# Altium PCB HYPNOSIA_controller_V2.PcbDoc
Units mm, origin at the board's own origin, x right, y up, seen from the top; angles counter-clockwise.
Board outline 106 x 58 mm, 2 copper layers (Top Layer, Bottom Layer), stack 0.78 mm thick; 56 components, 74 nets, 404 pads, 88 vias.
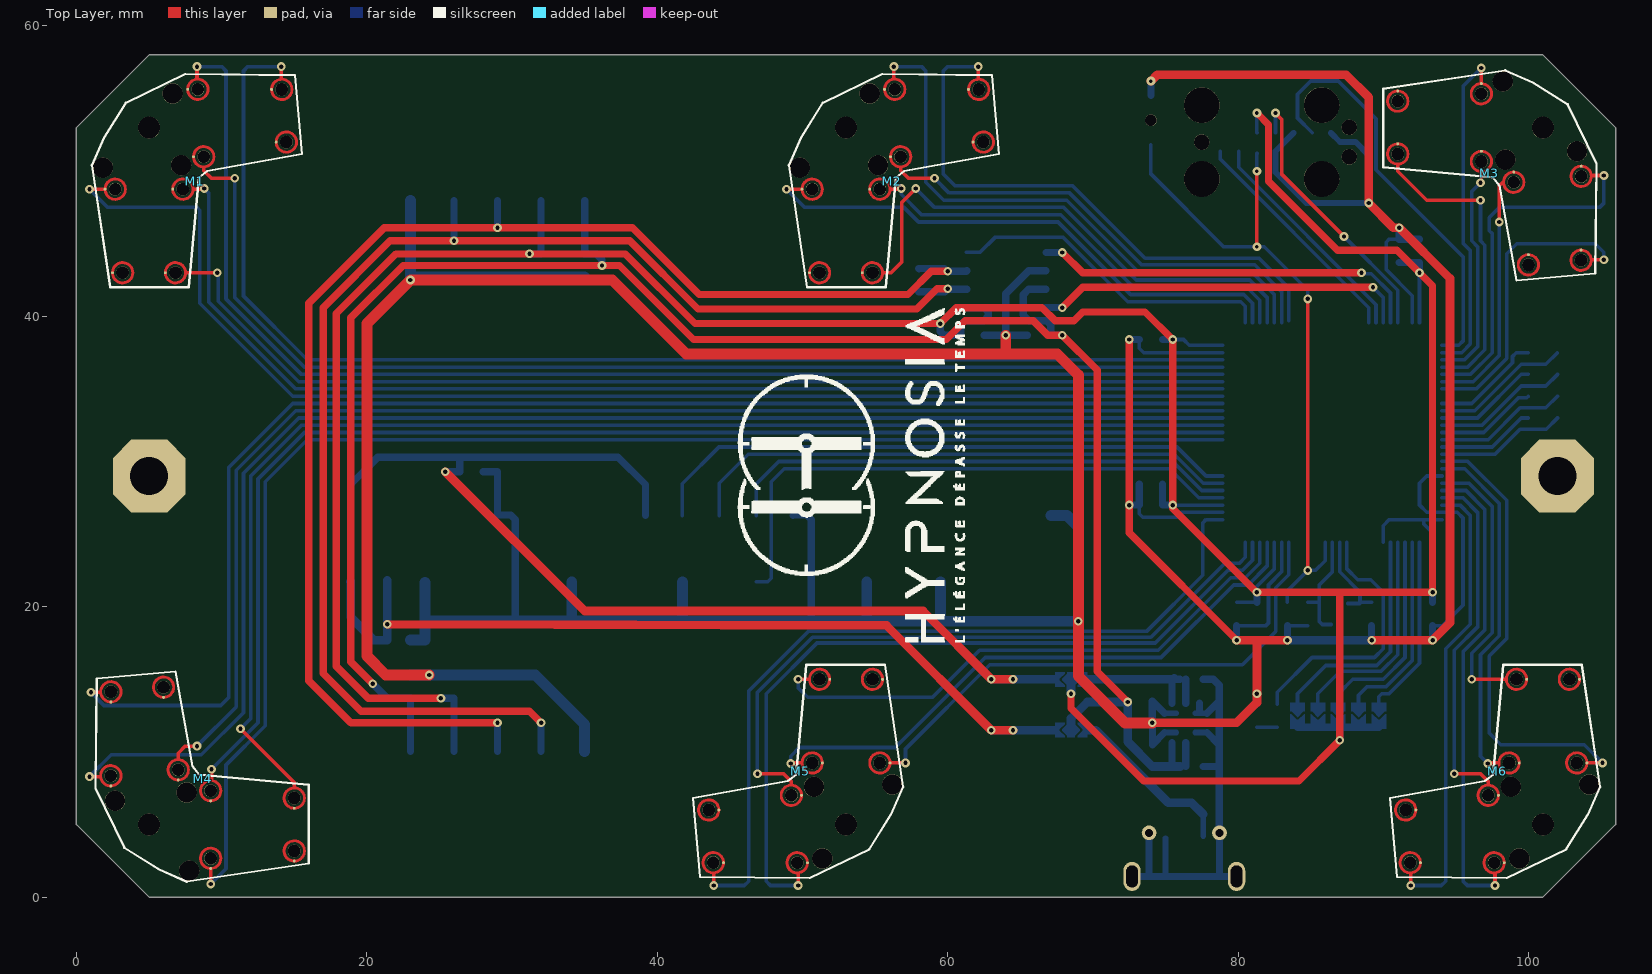
[diagram p0: Top Layer view]
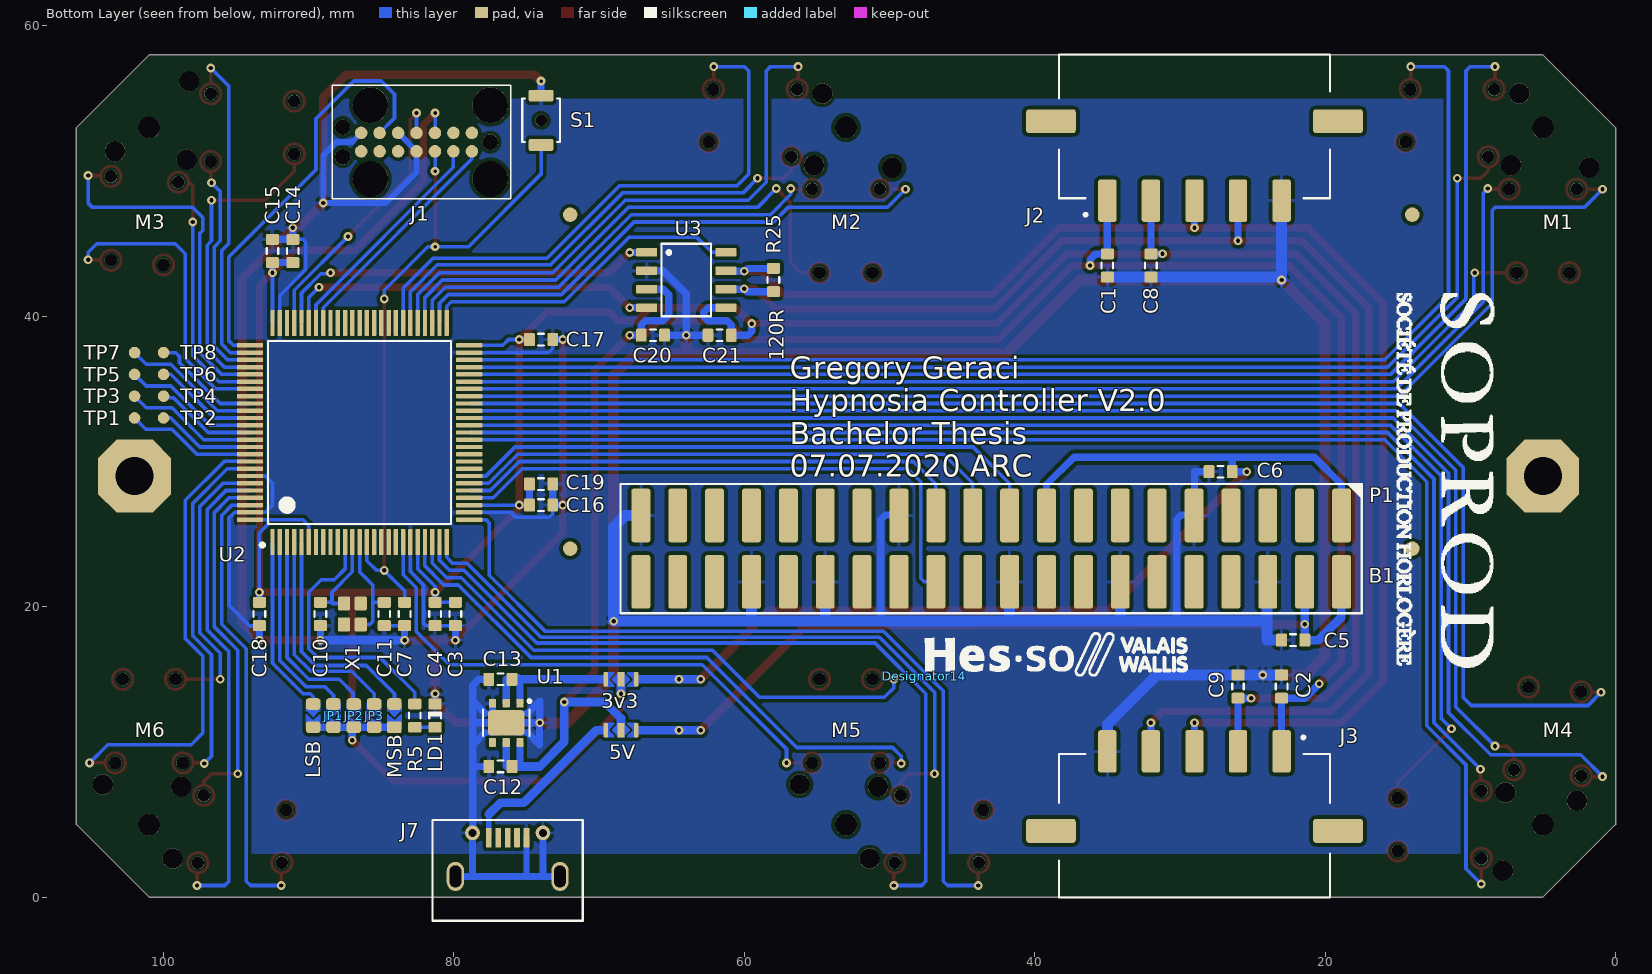
[diagram p1: Bottom Layer view, seen from below]
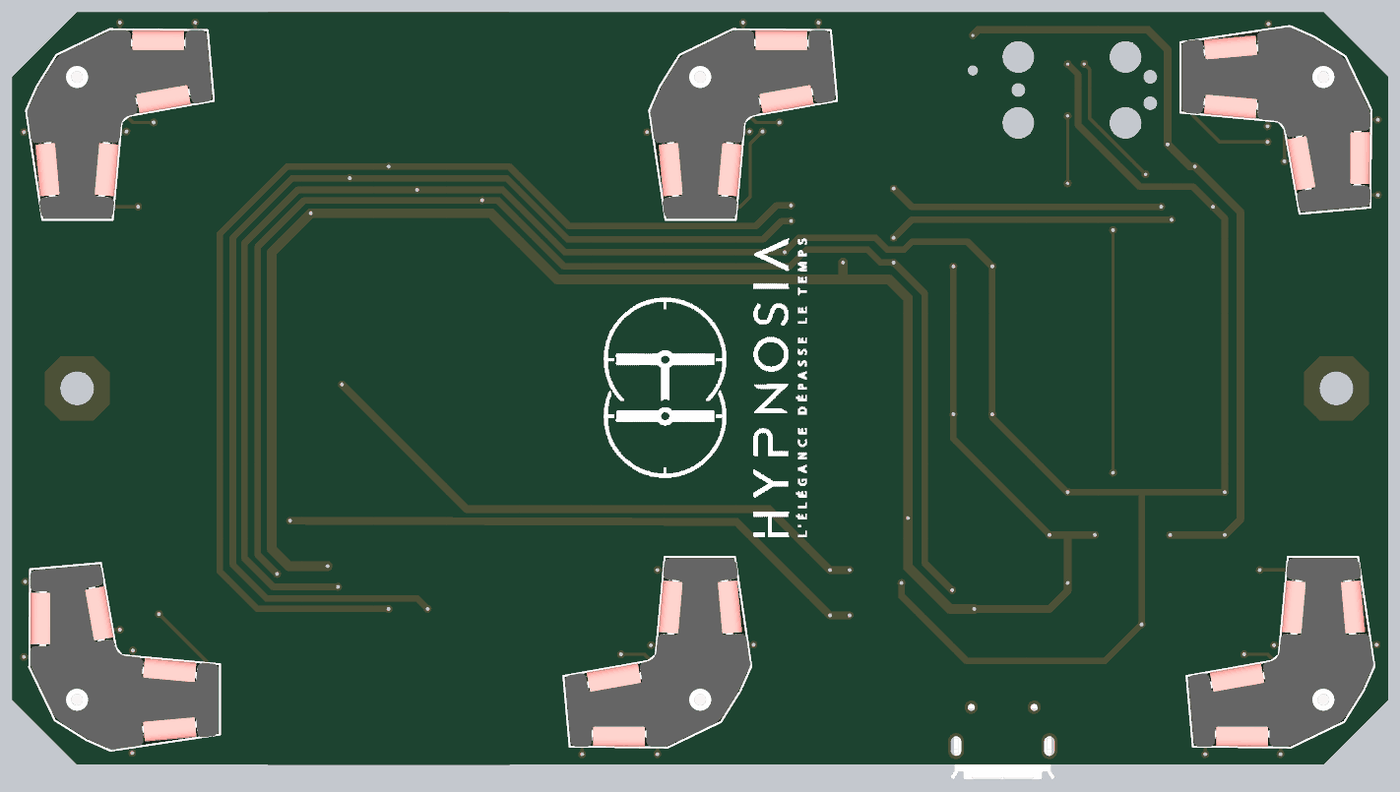
[diagram p2: 3D render of the assembled board from above, using the file's embedded part models]

## Layer stack, top to bottom
Top Solder: solder mask 0.1, Solder Resist, Dk 3.5
Top Layer: signal copper 0.035
Dielectric 3: prepreg 0.71, Dk 4.2
Bottom Layer: signal copper 0.035
Bottom Solder: solder mask 0.1, Solder Resist, Dk 3.5

## Board outline
5,0 0,5 0,53 5,58 101,58 106,53 106,5 101,0

## Design rules (kind name [scope] priority, off if disabled: settings)
AcuteAngle [All] p1: minimum=9.00000000000000E+0001 checktracksonly=TRUE
AssemblyTestPointUsage [All] p1 off:
AssemblyTestpoint [All] p1 off: testpointundercomponent=TRUE minsize=1.016 maxsize=2.54 preferedsize=1.524 minholesize=0 maxholesize=1.016 preferedholesize=0.813 testpointgrid=0.025 usegrid=TRUE gridtolerance=0 allowsidetop=TRUE allowsidebottom=TRUE
BoardOutlineClearance [All] p1: gap=0.25 ignorepadtopadclearanceinfootprint=FALSE
Clearance [All] p1: gap=0.14 ignorepadtopadclearanceinfootprint=FALSE except(0.25: Arc-Poly Track-Poly SMDPad-Poly THPad-Poly Via-Poly Fill-Poly Poly-Poly Poly-Region Poly-Text Poly-Hole)
ComponentClearance [All] p1 off: gap=0.25 collisioncheckmode=3 verticalgap=2540 showdistances=FALSE
DiffPairsRouting [All] p1 off: maxlimit=0.254 minlimit=0.254 mostfreqgap=0.254 toplayer_minwidth=0.381 toplayer_maxwidth=0.381 toplayer_prefwidth=0.381 bottomlayer_minwidth=0.381 bottomlayer_maxwidth=0.381 bottomlayer_prefwidth=0.381 maxuncoupledlength=12.7
FabricationTestPointUsage [All] p1 off: valid=0 allowmultiple=FALSE
FabricationTestpoint [All] p1 off: side=3 testpointundercomponent=TRUE minsize=1.016 maxsize=2.54 preferedsize=1.524 minholesize=0 maxholesize=1.016 preferedholesize=0.813 testpointgrid=0.025 allowsidetop=TRUE allowsidebottom=TRUE usegrid=TRUE gridtolerance=0
FanoutControl Fanout_BGA [IsBGA] p1 off: bgadir=Out bgaviamode=Centered fanoutstyle=Auto fanoutdirection=Alternating viagrid=0.025 // Fanout_BGA (Default Rule)
FanoutControl Fanout_LCC [IsLCC] p2 off: bgadir=Out bgaviamode=Centered fanoutstyle=Auto fanoutdirection=Alternating viagrid=0.025 // Fanout_LCC (Default Rule)
FanoutControl Fanout_SOIC [IsSOIC] p3 off: bgadir=Out bgaviamode=Centered fanoutstyle=Auto fanoutdirection=Alternating viagrid=0.025 // Fanout_SOIC (Default Rule)
FanoutControl Fanout_Small [(CompPinCount < 5)] p4 off: bgadir=Out bgaviamode=Centered fanoutstyle=Auto fanoutdirection=OutThenIn viagrid=0.025 // Fanout_Small (Default Rule)
FanoutControl Fanout_Default [All] p5 off: bgadir=Out bgaviamode=Centered fanoutstyle=Auto fanoutdirection=Alternating viagrid=0.025 // Fanout_Default (Default Rule)
Height [All] p1 off: minheight=0 maxheight=25.4 prefheight=12.7
HoleSize [All] p1: absolutevalues=TRUE maxlimit=3 minlimit=0.35 maxpercent=80.000 minpercent=20.000
HoleToHoleClearance [All] p1: gap=0.25 allowstackedmicrovias=TRUE
MinimumAnnularRing [All] p1: minimumring=0.175
MinimumSolderMaskSliver [All] p1 off: minsoldermaskwidth=0
PlaneClearance [All] p1: clearance=0.25
PlaneConnect [All] p1: planeconnectstyle=Relief reliefexpansion=0.5 reliefentries=4 reliefconductorwidth=0.25 reliefairgap=0.25
PolygonConnect [All] p1: connectstyle=Relief reliefconductorwidth=0.25 reliefentries=4 polygonreliefangle="90 Angle" airgapwidth=0.25
RoutingCorners [All] p1 off: cornerstyle=45-Degree minsetback=2.5 maxsetback=2.5
RoutingLayers [All] p1 off: top layer_v5=TRUE bottom layer_v5=TRUE
RoutingPriority [All] p1 off: routingpriority=0
RoutingTopology [All] p1 off: topology=Shortest
RoutingVias [All] p1: holewidth=0.3 width=1.3 viastyle="Through Hole" minholewidth=0.15 minwidth=0.3 maxholewidth=0.9 maxwidth=0.8
SilkToBoardRegionClearance [All] p1 off:
SilkToSilkClearance [All] p1 off: silktosilkclearance=0
SilkToSolderMaskClearance [IsPad] p1 off: minsilkscreentomaskgap=0 clearancetoexposedcopper=TRUE
SolderMaskExpansion [All] p1: expansion=0
Width [All] p1: maxlimit=4 minlimit=0.15 preferedwidth=0.25
6 further rules are at their usual default settings.

## Components (designator, comment, footprint, x,y, rotation, side; value= is the part's Value field where it differs from the comment)
3v3 "{Value}" "JUMPER3 SMD 1608" 68.5,15 r0 bottom
5V "{Value}" "JUMPER3 SMD 1608" 68.5,11.5 r0 bottom
B1 "Raspberry Pi Zero Socket" "Raspberry Pi Zero Socket SMD" 43,24 r0 bottom locked
C1 "100nF" "CAPACITOR 1608 REFLOW" 35,43.5 r90 bottom
C2 "100nF" "CAPACITOR 1608 REFLOW" 23,14.5 r270 bottom
C3 "10nF" "CAPACITOR 1608 REFLOW" 79.9,19.5 r90 bottom
C4 "1uF" "CAPACITOR 1608 REFLOW" 81.3,19.5 r90 bottom
C5 "100nF" "CAPACITOR 1608 REFLOW" 22.2,17.7 r0 bottom
C6 "100nF" "CAPACITOR 1608 REFLOW" 27.2,29.3 r180 bottom
C7 "100nF" "CAPACITOR 1608 REFLOW" 83.4,19.5 r90 bottom
C8 "100nF" "CAPACITOR 1608 REFLOW" 32,43.5 r90 bottom
C9 "100nF" "CAPACITOR 1608 REFLOW" 26,14.5 r270 bottom
C10 "10pF" "CAPACITOR 1608 REFLOW" 89.2,19.5 r270 bottom
C11 "10pF" "CAPACITOR 1608 REFLOW" 84.8,19.5 r270 bottom
C12 "10uF" "CAPACITOR 1608 REFLOW" 76.801,9 r180 bottom
C13 "10uF" "CAPACITOR 1608 REFLOW" 76.801,15 r180 bottom
C14 "100nF" "CAPACITOR 1608 REFLOW" 91.1,44.5 r270 bottom
C15 "4.7uF" "CAPACITOR 1608 REFLOW" 92.5,44.5 r270 bottom
C16 "100nF" "CAPACITOR 1608 REFLOW" 74,27 r0 bottom
C17 "100nF" "CAPACITOR 1608 REFLOW" 74,38.4 r0 bottom
C18 "100nF" "CAPACITOR 1608 REFLOW" 93.4,19.5 r90 bottom
C19 "4.7uF" "CAPACITOR 1608 REFLOW" 74,28.445 r0 bottom
C20 "100nF" "CAPACITOR 1608 REFLOW" 66.3,38.7 r0 bottom
C21 "100nF" "CAPACITOR 1608 REFLOW" 61.7,38.699 r180 bottom
Designator14 "Comment" "HES-SO_3 Top Overlay" 47.595,15.2 r180 bottom
J1 "TAG CONNECT TC2070-IDC" "TAG CONNECT TC2070-IDC" 77.5,52 r0 bottom
J2 "43650-0512" "MOLEX 43650-0512" 29,53 r0 bottom
J3 "43650-0512" "MOLEX 43650-0512" 29,5 r180 bottom
J7 "USB-MICRO-B" "USB-MICRO-B HIROSE ZX62D-B-5PA8" 76.3,4.1 r180 bottom
JP1 "{Value}" "JUMPER2 SMD 1608 Improved"#1 88.3,12.5 r270 bottom
JP2 "{Value}" "JUMPER2 SMD 1608 Improved"#1 86.9,12.5 r270 bottom
JP3 "{Value}" "JUMPER2 SMD 1608 Improved"#1 85.5,12.5 r270 bottom
LD1 "TBR" "LED 1608 REFLOW" 81.3,12.5 r270 bottom value=Blue
LSB "{Value}" "JUMPER2 SMD 1608 Improved"#1 89.7,12.5 r270 bottom
M1 "GB3MV2.2" GB2MV2.1 5,53 r0 top locked
M2 "GB3MV2.2" GB2MV2.1 53,53 r0 top locked
M3 "GB3MV2.2" GB2MV2.1 101,53 r270 top locked
M4 "GB3MV2.2" GB2MV2.1 5,5 r90 top locked
M5 "GB3MV2.2" GB2MV2.1 53,5 r180 top locked
M6 "GB3MV2.2" GB2MV2.1 101,5 r180 top locked
MSB "{Value}" "JUMPER2 SMD 1608 Improved"#2 84.1,12.5 r270 bottom
R5 "TBR" "RESISTOR 1608 REFLOW" 82.7,12.5 r90 bottom value=60
R25 "120" "RESISTOR 1608 REFLOW" 58,42.5 r270 bottom
S1 "*" "Push Button C2.5X3.0 OMRON B3U-1000P(M)-B" 74,53.503 r270 bottom
TP1 "*" "Pad D0.8" 102,33 r180 bottom
TP2 "*" "Pad D0.8" 100,33 r180 bottom
TP3 "*" "Pad D0.8" 102,34.5 r180 bottom
TP4 "*" "Pad D0.8" 100,34.5 r180 bottom
TP5 "*" "Pad D0.8" 102,36 r180 bottom
TP6 "*" "Pad D0.8" 100,36 r180 bottom
TP7 "*" "Pad D0.8" 101.996,37.5 r180 bottom
TP8 "*" "Pad D0.8" 100,37.5 r180 bottom
U1 "LD39200PU" "DFN6 P0.95 T1.75X2.50 C3.0X3.0 H1.0" 76.4,12 r270 bottom
U2 "STM32F072V8T6" "LQFP100 P0.5 C14.0X14.0 H1.6" 86.5,32 r90 bottom
U3 "=Value" "SO8 P1.27 C4.0X5.0 H1.75" 64,42.5 r180 bottom
X1 "16MHz" "Crystal C2.5x2 Seiko Epson FA-128" 87,19.5 r90 bottom

## Footprints (in the part's own frame and the unit in brackets; to place one, negate y for a bottom-side part, rotate by r counter-clockwise, add the part's x,y. Pads: shape width x height; smd on the part's side, far side on the other; paste and mask are expansions set on the pad)
"CAPACITOR 1608 REFLOW" [mm] "Capacitor SMD 1.6x0.8mm (0603-imperial)"
  rrect25% 0.75x0.9 smd: 1(-0.8,0) 2(0.8,0)
  silkscreen extent -0.2,-0.4 0.2,0.4, body extent -0.8,-0.4 0.8,0.4, height 0.8
"Crystal C2.5x2 Seiko Epson FA-128" [mm] "Crystal Seiko Epson FA-128, Case 2.0x1.6, Height 0.5"
  rrect25% 0.95x0.85 smd: 1(-0.725,-0.575) 2(0.725,-0.575) 3(0.725,0.575) 4(-0.725,0.575)
  body extent -1,-0.8 1,0.8, height 0.5
"DFN6 P0.95 T1.75X2.50 C3.0X3.0 H1.0" [mm] "DFN6 P0.95 T1.75X2.50 C3.0X3.0 H1.0"
  rrect25% 0.6x0.5 smd: 1(-1.35,0.95) 2(-1.35,0) 3(-1.35,-0.95) 4(1.35,-0.95) 5(1.35,0) 6(1.35,0.95)
  rrect25% 1.75x2.5 smd: 7(0,0)
  silkscreen extent -1.6,-1.6 0.9,1.7, body extent -1.5,-1.5 1.5,1.5, height 1.1
GB2MV2.1 [mm] "Soprod Gear Box, 2 motors 102.02.xxx, Option B"
  round 0.88 hole 0.88 unplated mask+0.4: 0(-2.33,-4.242) 0(-1.82,-10) 0(1.82,-10) 0(2.33,-4.242) 0(3.359,2.633) 0(3.765,-2.009) 0(9.139,2.627) 0(9.456,-1)
  round 0.2 smd: 1(-3.03,-4.242) 2(-2.52,-10) 3(1.12,-10) 4(1.63,-4.242) 5(2.659,2.633) 6(3.065,-2.009) 7(8.439,2.627) 8(8.756,-1)
  round 1.5 hole 1.5 unplated: 14(0,0)
  round 1.4 hole 1.4 unplated: A1(-3.182,-2.758) A2(1.637,2.344) A3(2.207,-2.596)
  Top Layer circle w0.2: c9.456,-1 r0.7
  Top Layer circle w0.2: c9.139,2.627 r0.7
  Top Layer circle w0.2: c3.765,-2.009 r0.7
  Top Layer circle w0.2: c3.359,2.633 r0.7
  Top Layer circle w0.2: c2.33,-4.242 r0.7
  Top Layer circle w0.2: c1.82,-10 r0.7
  Top Layer circle w0.2: c-1.82,-10 r0.7
  Top Layer circle w0.2: c-2.33,-4.242 r0.7
  silkscreen extent -3.94,-11 10.54,3.68, body extent -8.25,-13.45 13.41,8.21, height 4.4
"HES-SO_3 Top Overlay" [mm] "HESSO LOGO 3mm on TopOverlay"
  silkscreen extent 0.01,0 18.12,3
"JUMPER2 SMD 1608 Improved"#1 [mm] "JUMPER SMD 2 LEADS 1608 (0603-Imperial)"
  rrect50% 0.8x1 smd paste-0.8: 1(-0.8,0) 2(0.8,0)
  Top Layer region: -0.1,0.45 0.3,0.05 0.3,-0.05 -0.1,-0.45 -0.1,-0.5 0.9,-0.5 0.9,0.5 -0.1,0.5
  Top Layer region: -0.9,0.5 -0.9,-0.5 -0.3,-0.5 -0.3,-0.4 0.1,0 -0.3,0.4 -0.3,0.5
"JUMPER2 SMD 1608 Improved"#2 [mm] "JUMPER SMD 2 LEADS 1608 (0603-Imperial)"
  rrect50% 0.8x1 smd paste-0.8: 1(-0.8,0)
  rrect25% 0.8x1 smd paste-0.8: 2(0.8,0)
  Top Layer region: -0.1,0.45 0.3,0.05 0.3,-0.05 -0.1,-0.45 -0.1,-0.5 0.9,-0.5 0.9,0.5 -0.1,0.5
  Top Layer region: -0.9,0.5 -0.9,-0.5 -0.3,-0.5 -0.3,-0.4 0.1,0 -0.3,0.4 -0.3,0.5
"JUMPER3 SMD 1608" [mm] "JUMPER SMD 3LEADS 1608 (0603-Imperial)"
  rrect50% 0.3x1 smd paste-0.8 mask-0.5: 1(-1.05,0) 3(1.05,0)
  rect 0.5x1 smd paste-0.8 mask-0.5: 2(0,0)
  Top Layer region: 1.1,-0.5 1.1,0.5 0.45,0.5 0.45,0.4 0.8,0.05 0.8,-0.05 0.45,-0.4 0.45,-0.5
  Top Layer region: -0.25,0.4 -0.6,0.05 -0.6,-0.05 -0.25,-0.4 -0.25,-0.5 0.25,-0.5 0.25,-0.4 0.6,-0.05 0.6,0.05 0.25,0.4 0.25,0.5 0.1,0.5 -0.25,0.5
  Top Layer region: -1.1,0.5 -1.1,-0.5 -0.45,-0.5 -0.45,-0.4 -0.8,-0.05 -0.8,0.05 -0.45,0.4 -0.45,0.5
"LED 1608 REFLOW" [mm] "LED SMD 1.6x0.8mm (0603-imperial)"
  rrect25% 0.75x0.9 smd: 1(-0.8,0) 2(0.8,0)
  silkscreen extent -0.2,-0.4 0.2,0.4, body extent -0.8,-0.4 0.8,0.4, height 0.45
"LQFP100 P0.5 C14.0X14.0 H1.6" [mm] "Thin QFP, 100-Leads, Body 14x14mm, Pitch 0.5mm, IPC Medium Density"
  rrect25% 1.8x0.3 smd: 1(-7.55,6) 2(-7.55,5.5) 3(-7.55,5) 4(-7.55,4.5) 5(-7.55,4) 6(-7.55,3.5) 7(-7.55,3) 8(-7.55,2.5) 9(-7.55,2) 10(-7.55,1.5) 11(-7.55,1) 12(-7.55,0.5) 13(-7.55,0) 14(-7.55,-0.5) 15(-7.55,-1) 16(-7.55,-1.5) 17(-7.55,-2) 18(-7.55,-2.5) 19(-7.55,-3) 20(-7.55,-3.5) 21(-7.55,-4) 22(-7.55,-4.5) 23(-7.55,-5) 24(-7.55,-5.5) 25(-7.55,-6) 51(7.55,-6) 52(7.55,-5.5) 53(7.55,-5) 54(7.55,-4.5) 55(7.55,-4) 56(7.55,-3.5) 57(7.55,-3) 58(7.55,-2.5) 59(7.55,-2) 60(7.55,-1.5) 61(7.55,-1) 62(7.55,-0.5) 63(7.55,0) 64(7.55,0.5) 65(7.55,1) 66(7.55,1.5) 67(7.55,2) 68(7.55,2.5) 69(7.55,3) 70(7.55,3.5) 71(7.55,4) 72(7.55,4.5) 73(7.55,5) 74(7.55,5.5) 75(7.55,6)
  rrect25% 0.3x1.8 smd: 26(-6,-7.55) 27(-5.5,-7.55) 28(-5,-7.55) 29(-4.5,-7.55) 30(-4,-7.55) 31(-3.5,-7.55) 32(-3,-7.55) 33(-2.5,-7.55) 34(-2,-7.55) 35(-1.5,-7.55) 36(-1,-7.55) 37(-0.5,-7.55) 38(0,-7.55) 39(0.5,-7.55) 40(1,-7.55) 41(1.5,-7.55) 42(2,-7.55) 43(2.5,-7.55) 44(3,-7.55) 45(3.5,-7.55) 46(4,-7.55) 47(4.5,-7.55) 48(5,-7.55) 49(5.5,-7.55) 50(6,-7.55) 76(6,7.55) 77(5.5,7.55) 78(5,7.55) 79(4.5,7.55) 80(4,7.55) 81(3.5,7.55) 82(3,7.55) 83(2.5,7.55) 84(2,7.55) 85(1.5,7.55) 86(1,7.55) 87(0.5,7.55) 88(0,7.55) 89(-0.5,7.55) 90(-1,7.55) 91(-1.5,7.55) 92(-2,7.55) 93(-2.5,7.55) 94(-3,7.55) 95(-3.5,7.55) 96(-4,7.55) 97(-4.5,7.55) 98(-5,7.55) 99(-5.5,7.55) 100(-6,7.55)
  silkscreen extent -7.87,-6.3 6.3,6.83, body extent -7,-7 7,7, height 1.61
"MOLEX 43650-0512" [mm] "MicroFit RA HDR 5Ckt SR SMT w/SldTab"
  rrect25% 1.27x2.92 smd: 1(6,5.035) 2(3,5.035) 3(0,5.035) 4(-3,5.035) 5(-6,5.035)
  rrect25% 3.43x1.65 smd: 6(-9.885,-0.435) 7(9.885,-0.435)
  silkscreen extent -9.33,-5.03 9.33,6.1, body extent -11.44,-5.04 11.43,6.37, height 5.92
"Pad D0.8" [mm] "Test Point simple pad diameter 0.8, no hole"
  round 0.8 smd: 1(0,0)
"Push Button C2.5X3.0 OMRON B3U-1000P(M)-B" [mm] "Push Button C2.5X3.0 OMRON B3U-1000P(M)-B"
  rrect25% 0.8x1.7 smd: 1(-1.7,0) 2(1.7,0)
  round 0.8 hole 0.8 unplated: 3(0,0)
  silkscreen extent -1.5,-1.3 1.5,1.3, body extent -1.5,-1.25 1.5,1.25, height 1.6
"Raspberry Pi Zero Socket SMD" [mm] "Raspberry Pi Zero Socket"
  round 1 smd: 0(-29,-23) 0(-29,0) 0(29,-23) 0(29,0)
  rrect25% 1.3x3.7 smd: 1(-24.13,-2.286) 2(-24.13,2.286) 3(-21.59,-2.286) 4(-21.59,2.286) 5(-19.05,-2.286) 6(-19.05,2.286) 7(-16.51,-2.286) 8(-16.51,2.286) 9(-13.97,-2.286) 10(-13.97,2.286) 11(-11.43,-2.286) 12(-11.43,2.286) 13(-8.89,-2.286) 14(-8.89,2.286) 15(-6.35,-2.286) 16(-6.35,2.286) 17(-3.81,-2.286) 18(-3.81,2.286) 19(-1.27,-2.286) 20(-1.27,2.286) 21(1.27,-2.286) 22(1.27,2.286) 23(3.81,-2.286) 24(3.81,2.286) 25(6.35,-2.286) 26(6.35,2.286) 27(8.89,-2.286) 28(8.89,2.286) 29(11.43,-2.286) 30(11.43,2.286) 31(13.97,-2.286) 32(13.97,2.286) 33(16.51,-2.286) 34(16.51,2.286) 35(19.05,-2.286) 36(19.05,2.286) 37(21.59,-2.286) 38(21.59,2.286) 39(24.13,-2.286) 40(24.13,2.286)
  silkscreen extent -25.53,-4.45 25.53,4.44, body extent -25.4,-3.43 25.4,3.43, height 8.5
"RESISTOR 1608 REFLOW" [mm] "Resistor SMD 1.6x0.8mm (0603-imperial)"
  rrect25% 0.75x0.9 smd: 1(-0.8,0) 2(0.8,0)
  silkscreen extent -0.2,-0.4 0.2,0.4, body extent -0.77,-0.42 0.78,0.43, height 0.45
"SO8 P1.27 C4.0X5.0 H1.75" [mm] "8-Pin Small Outline Integrated Circuit 1.27 mm Pitch, IPC Medium Density"
  rrect25% 1.45x0.6 smd: 1(-2.725,1.905) 2(-2.725,0.635) 3(-2.725,-0.635) 4(-2.725,-1.905) 5(2.725,-1.905) 6(2.725,-0.635) 7(2.725,0.635) 8(2.725,1.905)
  silkscreen extent -1.7,-2.5 1.7,2.5, body extent -2,-2.5 2,2.5, height 1.76
"TAG CONNECT TC2070-IDC" [mil] "TAG CONNECT TC2070-IDC"
  round 34 smd: 1(50,-25) 2(100,-25) 3(150,-25) 4(200,-25) 5(250,-25) 6(300,-25) 7(350,-25) 8(350,25) 9(300,25) 10(250,25) 11(200,25) 12(150,25) 13(100,25) 14(50,25)
  round 96.5 hole 96.5 unplated: 15(0,100) 17(0,-100) 18(325,-100) 21(325,100)
  round 42 hole 42 unplated: 16(0,0) 19(400,-39.96) 20(400,39.96)
  silkscreen extent -55,-154 429,154
"USB-MICRO-B HIROSE ZX62D-B-5PA8" [mm] "USB-MICRO-B HIROSE nr. ZX62D-B-5PA8"
  rrect25% 0.4x1.35 smd: 1(-1.3,0) 2(-0.65,0) 3(0,0) 4(0.65,0) 5(1.3,0)
  round 1.016 hole 0.55: 6(2.425,0.325) 9(-2.425,0.325)
  oval 1.2x2 hole 0.8 slot 1.5 at 90 deg: 7(3.6,-2.675) 8(-3.6,-2.675)
  silkscreen extent -5.18,-5.72 5.18,1.2, body extent -4.05,-5.25 4.05,0.55, height 2.79

## Part data
3v3 5V: library part "JUMPER 3 POS", "JUMPER 3 POS"
B1: "Small single-board computer"
C1 C2 C3 C4 C5 C6 C7 C8 C9 C10 C11 C12 C13 C14 C15 C16 C17 C18 C19 C20 C21: library part Capacitor, "Capacitor"
J2 J3: library part "MOLEX 43650-0512", "MicroFit RA HDR 5Ckt SR SMT w/SldTab", Manufacturer=Molex, Mouser No=538-43650-0512
J7: library part "USB-MICRO-B HIROSE ZX62D-B-5PA8", "USB-MICRO-B HIROSE ZX62D-B-5PA8"
JP1 JP2 JP3 LSB MSB: library part "JUMPER 2 POS", "JUMPER 2 POS"
LD1: library part LED, "LED generic"
M1 M2 M3 M4 M5 M6: library part GB2MV2.1, "Soprod Gear Box, 2 motors 102.02.xxx"
R5 R25: library part Resistor, "Resistor"
S1: library part "Push Button 2Pins", "Push Button, 2 pins"
TP1 TP2 TP3 TP4 TP5 TP6 TP7 TP8: library part Pad, "Pad"
U1: library part LD39200, "2 A high PSRR ultra low drop linear regulator with reverse current protection", Manufacturer=ST
U2: "Arm-based 32-bit MCU, up to 128 KB Flash, crystal-less USB FS 2.0, CAN, 12 timers, ADC, DAC & comm. interfaces, 2.0 - 3.6 V", Manufacturer=ST, Mouser No=511-STM32F072V8T6
U3: library part MCP2542WFD-E/SN, "CAN FD Transceiver with Wake-Up Pattern (WUP) Option"
X1: library part "Crystal C2.5x2 Seiko Epson FA-128", "Crystal C2.5x2 Seiko Epson FA-128"

## Free pads (board coordinates)
  oct 5x5 hole 2.6 unplated: 0(5,29) 0(102,29)

## Via types
v1: diameter 0.6, hole 0.3, Top Layer to Bottom Layer, tented both sides, 82 vias
v2: diameter 0.6, hole 0.25, Top Layer to Bottom Layer, tented both sides, 6 vias

## Nets (pads, with @x,y where several pads share a name; then routed paths per layer and width w, separated by ;. In a path a pad name is that pad's centre, name@x,y a point inside that pad or via, vN(x,y) a via of type N, cw(c..) or ccw(c..) an arc to the next point about the centre after c; other vN are vias at no path point)
3v3: 3v3.2 C3.2 C4.2 C8.2 C9.2 C14.2 C15.2 C16.2 C17.2 C18.2 C19.2 C21.2 J1.3 J2.2 J3.2 JP1.2 JP2.2 JP3.2 LSB.2 MSB.2 U2.6 U2.21 U2.28 U2.50 U2.75 U2.100 U3.5 | length 258.5
  Top Layer w0.5: v1(25.1,13.7) 20.1,13.7 17.9,15.9 17.9,40.2 22,44.3 v1(31.2,44.3) 37.801,44.299 42.6,39.5 v1(59.5,39.5) 60.599,40.599 66.501,40.599 67.403,39.697 68.7,39.697 69.303,40.3 73.6,40.3 v1(75.5,38.4) v1(75.5,27) 75.5,26.762 81.281,20.981 v1(81.3,21) 87,21 ; v1(68.5,14) 68.5,13 73.5,8 84.2,8 v1(87,10.8) 87,21 ; v2(81.3,54) 82.1,53.2 82.1,49.3 86.85,44.55 90.95,44.55 v1(92.5,43) 93.4,42.1 v1(93.4,21) 87,21
  Bottom Layer w0.25: v1(75.5,27) U2.28 ; v1(75.5,38.4) 76.247,38.4 76.647,38 U2.50 ; C3.2 C4.2 ; v1(81.3,21) 81.3,21.4 82.5,22.6 U2.21 ; v2(81.3,54) 81.3,52.645 J1.3 ; U2.6 90,25.586 90.414,26 92.8,26 ; U2.75 v1(92.5,43) ; v1(93.4,21) 93.4,25.1 92.8,25.7 92.8,26 ; U2.100 92.8,26
  Bottom Layer w0.5: v1(25.1,13.7) C9.2 J3.2 ; v1(31.2,44.3) C8.2 J2.2 ; v1(59.5,39.5) 59.5,38.956 59.756,38.7 60.898,38.7 C21.2 60.9,39.399 61.201,39.7 62.5,39.7 62.8,40 62.8,40.3 62.501,40.599 61.279,40.599 U3.5 ; C19.2 C16.2 v1(75.5,27) ; C17.2 v1(75.5,38.4) ; C4.2 v1(81.3,21) ; MSB.2 JP2.2 ; v1(87,10.8) 87,11.6 JP2.2 ; LSB.2 JP1.2 JP2.2 ; C14.2 C15.2 v1(92.5,43) ; C18.2 v1(93.4,21)
  Bottom Layer w0.6: v1(68.5,14) 3v3.2
3v3_ext: 3v3.3 C13.2 U1.1 U1.2 | length 9.9
  Bottom Layer w0.5: U1.1 75.45,14.949 75.501,15 ; 75.601,15.1 75.501,15 ; C13.2 75.501,15 ; U1.2 76.4,15
  Bottom Layer w0.6: 3v3.3@69.6,15 75.501,15
3v3_RB: 3v3.1 B1.1 B1.17 C6.2 | length 77.6
  Top Layer w0.6: v1(25.4,29.3) 35,19.7 58.3,19.7 v1(63,15) v1(64.5,15)
  Bottom Layer w0.5: B1.1 18.87,28.415 20.755,30.3 26.4,30.3 ; v1(25.4,29.3) C6.2 26.4,30.3 ; B1.17 39.19,28.41 37.3,30.3 26.4,30.3
  Bottom Layer w0.6: v1(63,15) v1(64.5,15) 3v3.1@67.4,15
5V: 5V.2 C1.2 C2.2 C12.2 C20.2 J2.1 J3.1 U1.5 U1.6 U3.3 | length 141
  Top Layer w0.5: v1(20.4,14.7) 18.9,16.2 18.9,39.9 22.5,43.5 v1(36.2,43.5) 37.4,43.5 42.5,38.4 59.9,38.4 61.2,39.7 65.9,39.7 66.9,38.7 v1(67.9,38.7) 70.3,36.3 70.3,15.539 v1(72.4,13.439)
  Bottom Layer w0.5: v1(20.4,14.7) 21.4,13.7 C2.2 J3.1 ; J2.1 C1.2 35.8,44.3 36.181,43.919 36.181,43.519 v1(36.2,43.5) ; U3.3@66.761,41.862 65.575,41.862 65.2,41.487 65.2,40.097 65.6,39.697 66.809,39.697 67.099,39.406 C20.2 ; C20.2 v1(67.9,38.7) ; U1.6 75.45,9.151 75.601,9 ; 76.4,9 U1.5
  Bottom Layer w0.6: 5V.2 68.5,12.3 69.639,13.439 v1(72.4,13.439) 72.4,10.7 74.1,9 75.601,9 C12.2
5V_ext: 5V.3 J7.1 | length 11.9
  Bottom Layer w0.4: J7.1@77.6,4.2 77.6,5.701
  Bottom Layer w0.6: 5V.3@69.6,11.5 70.2,11.5 75.2,6.5 76.801,6.5 77.6,5.701
5V_RB: 5V.1 B1.2 B1.4 C5.1 | length 60.2
  Top Layer w0.6: v1(21.41,18.8) 55.794,18.706 v1(63,11.5) v1(64.5,11.5)
  Bottom Layer w0.6: B1.2 18.9,21.684 18.9,19.275 20.475,17.7 C5.1 21.41,17.7 v1(21.41,18.8) B1.4@21.41,21.814 ; v1(63,11.5) v1(64.5,11.5) 5V.1@67.4,11.5
CAN_H: J2.3 J3.3 R25.1 U3.7 | length 96.2
  Top Layer w0.5: v1(29,12) 18.9,12 16,14.9 16,40.9 21.2,46.1 v1(29,46.1) 38.3,46.1 42.9,41.5 57.268,41.5 58.868,43.1 v1(60,43.1)
  Bottom Layer w0.5: J3.3 v1(29,12) ; v1(29,46.1) J2.3 ; R25.1 58.025,43.275 58.05,43.3 59.773,43.3 59.973,43.1 v1(60,43.1) 61.278,43.1 U3.7@61.311,43.134
CAN_L: J2.4 J3.4 R25.2 U3.6 | length 97.2
  Top Layer w0.5: v1(32,12) 31.2,12.8 19.6,12.8 17,15.4 17,40.6 21.6,45.2 v1(26,45.2) 38.1,45.2 42.8,40.5 57.865,40.5 59.265,41.9 v1(60,41.9)
  Bottom Layer w0.5: v1(26,45.2) J2.4 ; J3.4 v1(32,12) ; R25.2 59.8,41.7 v1(60,41.9) ; v1@60,41.864 U3.6@61.311,41.864
CAN_RX: U2.70 U3.4 | length 25.9
  Top Layer w0.5: v1(67.9,40.6) 69.297,41.997 89.297,41.997 v1(89.3,42)
  Bottom Layer w0.25: U3.4@66.761,40.594 U3.4@66.764,40.596 ; v1(89.3,42) 90,41.3 U2.70
  Bottom Layer w0.5: U3.4@66.764,40.596 66.768,40.6 v1(67.9,40.6)
CAN_TX: U2.71 U3.1 | length 27
  Top Layer w0.5: v1(67.9,44.4) 69.3,43 v1(88.5,43)
  Bottom Layer w0.25: U3.1@66.761,44.404 U3.1@66.776,44.389 ; v1(88.5,43) 88.562,42.938 89.175,42.938 90.5,41.613 U2.71
  Bottom Layer w0.5: U3.1@66.776,44.389 66.788,44.4 v1(67.9,44.4)
GND: B1.6 B1.9 B1.14 B1.20 B1.25 B1.30 B1.34 B1.39 C1.1 C2.1 C3.1 C4.1 C5.2 C6.1 C7.1 C8.1 C9.1 C10.2 C11.2 C12.1 C13.1 C14.1 C15.1 C16.1 C17.1 C18.1 C19.1 C20.1 C21.1 J1.5 J1.7 J1.11 J2.5 J3.5 J7.5 J7.6 J7.7 J7.8 J7.9 LD1.1 S1.1 U1.3 U1.7 U2.20 U2.27 U2.49 U2.74 U2.94 U2.99 U3.2 | length 466.3
  Top Layer w0.5: v1(72.5,38.4) v1(72.5,27) 72.5,25.1 v1(79.9,17.7)
  Top Layer w0.6: v2(74,56.2) 74.445,56.645 87.437,56.645 89,55.082 v1(89,47.8) 90.7,46.1 v1(91.1,46.1) 94.6,42.6 94.6,18.9 v1(93.4,17.7) v1(89.2,17.7) ; v1(74.1,12) 79.9,12 81.3,13.4 v1(81.3,14) 81.3,17.7 ; v1(79.9,17.7) v1(83.4,17.7)
  Top Layer w0.75: v1(24.3,15.3) 21.3,15.3 20,16.6 20,39.5 v1(23,42.5) 36.9,42.5 42,37.4 64,37.4 ; v1(64,38.7) 64,37.4 ; v1(74.1,12) 72.225,12 69,15.225 v1(69,19) 69,35.95 67.55,37.4 64,37.4
  Bottom Layer w0.25: B1.9@29,26.316 B1.9 ; C16.1 73.2,26.4 73.438,26.162 75.762,26.162 76.1,26.5 U2.27 ; C17.1 73.2,37.8 73.5,37.5 U2.49 ; C3.1 C4.1 81.925,18.7 82.1,18.875 82.1,21.5 83,22.4 U2.20 ; J1.11@82.572,51.373 J1.11 ; C7.1 C11.2 ; C14.1 90.4,45.3 90.2,45.1 90.2,43.225 92,41.425 U2.74 ; C18.1 94.1,18.7 95.493,20.093 95.493,26.107 95.1,26.5 U2.99 93,26.5 92.5,27 92.5,28.5 93,29 U2.94
  Bottom Layer w0.4: 74.937,12.663 U1.7@75.739,12.663 ; 74.938,11.337 U1.7@75.74,11.337 ; 75,1.425 J7.5@75,4.05 ; U1.7@77.06,11.337 77.862,11.337 ; U1.7@77.06,12.663 77.862,12.663 ; J1.11@82.572,51.373 J1.5@83.842,52.643 ; J1.11 82.58,49.92 84.7,47.8 v1(89,47.8) ; J1.7 87.025,52 88.1,52 89,51.1 v1(89,47.8) ; v1@89.1,47.8 v1(89,47.8)
  Bottom Layer w0.5: C6.1 28.992,29.3 28.992,29.1 29,29.092 29,26.316 29.904,26.316 30.22,26 30.22,19.01 ; B1.25 49.38,26.316 50.284,26.316 50.6,26 50.6,19 ; C21.1@62.5,38.7 v1(64,38.7) ; C20.1 v1(64,38.7) ; U3.2@66.761,43.134 65.579,43.134 64,41.555 v1(64,38.7) ; v1(72.5,27) C16.1 C19.1 ; v1(72.5,38.4) C17.1 ; J7.7 73.875,1.425 ; J7.6 73.875,1.425 ; S1.1 v2(74,56.2) ; v1(74.1,12) 74.1,13.5 74.937,12.663 ; 74.938,11.337 74.101,10.5 v1(74.1,12) U1.7 78.699,12 ; 77.35,12.9 U1.3 ; C12.1 78.701,9 ; C13.1 78.3,15 78.701,14.599 78.701,13.502 78.699,13.5 ; 77.862,11.337 78.699,10.5 ; 77.862,12.663 78.699,13.5 ; J7.9@78.701,4.525 78.701,9 ; J7.9 78.725,1.425 ; J7.8 78.725,1.425 ; v1(79.9,17.7) C3.1 ; LD1.1 v1(81.3,14) ; v1(83.4,17.7) C7.1 ; v1(89.2,17.7) C10.2 ; v1(91.1,46.1) C14.1 C15.1 ; v1(93.4,17.7) C18.1 ; 73.875,1.425 75,1.425 78.725,1.425 ; 78.699,10.5 78.699,12 ; 78.699,10.5 78.701,10.498 78.701,9 ; 78.699,12 78.699,13.5
  Bottom Layer w0.6: v1(83.4,17.7) v1(89.2,17.7)
  Bottom Layer w0.75: C2.1 C9.1 ; C5.2 24,17.7 24,19.01 ; J2.5 v1(23,42.5) 23.2,42.7 32.912,42.7 C1.1 ; B1.6@24,21.664 24,19.01 ; v1(24.3,15.3) C9.1 ; B1.14 34.11,19.01 ; J3.5 35,11.9 31.6,15.3 C9.1 ; 41.73,19 50.6,19 54.43,19 ; B1.20 41.73,19.01 34.11,19.01 ; B1.30 54.43,19 ; B1.34 59.51,19 ; B1.39 68.214,26.286 69,25.5 v1(69,19) 59.51,19 ; 24,19.01 30.22,19.01 34.11,19.01 ; 54.43,19 59.51,19
LED_1: R5.2 U2.11 | length 18.2
  Bottom Layer w0.25: R5.2 82.7,14.1 85.1,16.5 89.394,16.5 90,17.106 90,20.994 89.138,21.856 88.244,21.856 87.5,22.6 U2.11
M1_Ah: M1.5 U2.46 | length 89.4
  Top Layer w0.25: 8.3,56.405 v1(8.3,57.2)
  Bottom Layer w0.25: v1(8.3,57.2) 10,57.2 10.3,56.9 10.3,41.2 15.5,36 70.214,36 70.218,36.004 U2.46@78.95,36.004
M1_Am: M1.1 U2.43 | length 88.7
  Top Layer w0.25: v1(0.9,48.758) 0.913,48.758 M1.1@1.9,48.758
  Bottom Layer w0.25: v1(0.9,48.758) 2.158,47.5 8.3,47.5 8.5,47.3 8.5,40.9 14.9,34.5 73.3,34.5 U2.43
M1_Bh: M1.6 U2.47 | length 80.8
  Top Layer w0.25: 8.765,50.23 8.765,50.035 9.3,49.5 v1(10.9,49.5)
  Bottom Layer w0.25: v1(10.9,49.5) 10.9,41.3 15.7,36.5 U2.47
M1_Bm: M1.4 U2.44 | length 81
  Top Layer w0.25: 8.045,48.758 8.758,48.758 v1(8.8,48.8)
  Bottom Layer w0.25: v1(8.8,48.8) 9.1,48.5 9.1,41 15.1,35 U2.44
M1_Ch: M1.7 U2.48 | length 88.3
  Top Layer w0.25: 14.1,56.404 v1(14.1,57.2)
  Bottom Layer w0.25: v1(14.1,57.2) 11.8,57.2 11.5,56.9 11.5,41.4 15.9,37 U2.48
M1_Cm: M1.3 U2.45 | length 75.6
  Top Layer w0.25: 7.541,43 v1(9.7,43)
  Bottom Layer w0.25: v1(9.7,43) 9.767,42.933 9.767,41.033 15.3,35.5 U2.45
M2_Ah: M2.5 U2.55 | length 39.9
  Top Layer w0.25: 56.3,56.405 v1(56.3,57.2)
  Bottom Layer w0.25: v1(56.3,57.2) 58.2,57.2 58.5,56.9 58.5,49.235 59.735,48 68.2,48 73.2,43 81,43 82.5,41.5 U2.55
M2_Am: M2.1 U2.52 | length 37.7
  Top Layer w0.25: v1(48.9,48.758) 48.913,48.758 M2.1@49.9,48.758
  Bottom Layer w0.25: v1(48.9,48.758) 50.158,47.5 57,47.5 58,46.5 67.6,46.5 72.6,41.5 80.4,41.5 81,40.9 U2.52
M2_Bh: M2.6 U2.56 | length 32
  Top Layer w0.25: 56.765,50.23 56.765,50.035 57.3,49.5 v1(59.1,49.5)
  Bottom Layer w0.25: v1(59.1,49.5) 60.1,48.5 68.4,48.5 73.356,43.544 81.156,43.544 83,41.7 U2.56
M2_Bm: M2.4 U2.53 | length 30.4
  Top Layer w0.25: 56.045,48.758 56.758,48.758 v1(56.8,48.8)
  Bottom Layer w0.25: v1(56.8,48.8) 56.8,48.4 58.2,47 67.8,47 72.8,42 80.6,42 81.5,41.1 U2.53
M2_Ch: M2.7 U2.57 | length 39.7
  Top Layer w0.25: 62.1,56.404 v1(62.1,57.2)
  Bottom Layer w0.25: v1(62.1,57.2) 60,57.2 59.7,56.9 59.7,49.8 60.5,49 68.6,49 73.6,44 81.444,44 83.5,41.944 U2.57@83.5,39.7
M2_Cm: M2.3 U2.54 | length 36.1
  Top Layer w0.25: 55.541,43 56.1,43 56.85,43.75 56.85,47.85 v1(57.8,48.8)
  Bottom Layer w0.25: v1(57.8,48.8) 59.1,47.5 68,47.5 73,42.5 80.8,42.5 82,41.3 U2.54
M3_Ah: M3.5 U2.80 | length 24.5
  Top Layer w0.25: 104.405,49.7 v1(105.2,49.7)
  Bottom Layer w0.25: U2.80 96,36 97.5,37.5 97.5,45.702 97.3,45.902 97.3,46.8 98,47.5 104.9,47.5 105.2,47.8 v1(105.2,49.7)
M3_Am: M3.1 U2.77 | length 22.9
  Top Layer w0.25: M3.1@96.758,56.1 96.758,57.087 v1(96.758,57.1)
  Bottom Layer w0.25: U2.77 95.4,37.5 96,38.1 96,44.53 95.5,45.03 95.5,55.842 v1(96.758,57.1)
M3_Bh: M3.6 U2.81 | length 16.7
  Top Layer w0.25: v1(98,46.5) 98,49.005 98.23,49.235
  Bottom Layer w0.25: U2.81 96.2,35.5 98,37.3 v1(98,46.5)
M3_Bm: M3.4 U2.78 | length 15.3
  Top Layer w0.25: v1(96.7,49.2) 96.758,49.258 96.758,49.955
  Bottom Layer w0.25: U2.78 95.6,37 96.5,37.9 96.5,44.8 96.1,45.2 96.1,48.6 v1(96.7,49.2)
M3_Ch: M3.7 U2.82 | length 21.1
  Top Layer w0.25: 104.404,43.9 v1(105.2,43.9)
  Bottom Layer w0.25: U2.82 96.4,35 98.5,37.1 98.5,44.3 99.2,45 104.6,45 105.195,44.405 105.195,43.905 v1(105.2,43.9)
M3_Cm: M3.3 U2.79 | length 20.8
  Top Layer w0.25: 91,50.404 91,50 93,48 v1(96.7,48)
  Bottom Layer w0.25: U2.79 95.8,36.5 97,37.7 97,44.9 96.7,45.2 v1(96.7,48)
M4_Ah: M4.5 U2.40 | length 98.6
  Top Layer w0.25: v1(0.9,8.3) 1.6,8.3
  Bottom Layer w0.25: v1(0.9,8.3) 2.4,9.8 8.6,9.8 11.5,12.7 11.5,29.2 15.3,33 U2.40
M4_Am: M4.1 U2.37 | length 97.4
  Top Layer w0.25: v1(9.242,0.9) 9.242,0.913 M4.1@9.242,1.9
  Bottom Layer w0.25: v1(9.242,0.9) 10.3,1.958 10.3,9.1 13,11.8 13,28.6 15.9,31.5 U2.37
M4_Bh: M4.6 U2.41 | length 91.7
  Top Layer w0.25: 7.009,9.5 7.009,9.909 7.5,10.4 v1(8.3,10.4)
  Bottom Layer w0.25: v1(8.3,10.4) 11,13.1 11,29.4 15.1,33.5 U2.41
M4_Bm: M4.4 U2.38 | length 89.8
  Top Layer w0.25: 9.3,8.085 v1(9.3,8.8)
  Bottom Layer w0.25: v1(9.3,8.8) 12.5,12 12.5,28.8 15.7,32 U2.38
M4_Ch: M4.7 U2.42 | length 96.8
  Top Layer w0.25: v1(1,14.1) 1.6,14.1
  Bottom Layer w0.25: v1(1,14.1) 1.9,13.2 9.93,13.2 10.5,13.77 10.5,29.6 14.9,34 U2.42
M4_Cm: M4.3 U2.39 | length 91.7
  Top Layer w0.25: v1(11.3,11.6) 15,7.9 15,7.541
  Bottom Layer w0.25: v1(11.3,11.6) 12,12.3 12,29 15.5,32.5 U2.39
M5_Ah: M5.5 U2.24 | length 54.6
  Top Layer w0.25: v1(49.7,0.8) 49.7,1.595
  Bottom Layer w0.25: v1(49.7,0.8) 47.8,0.8 47.5,1.1 47.5,14 51,17.5 74.3,17.5 79.3,22.5 80.3,22.5 81,23.2 U2.24
M5_Am: M5.1 U2.19 | length 37.3
  Top Layer w0.25: M5.1@56.1,9.242 57.087,9.242 v1(57.1,9.242)
  Bottom Layer w0.25: v1(57.1,9.242) 57.1,10.2 62.903,16.003 80.303,16.003 82.6,18.3 82.6,21.3 83.5,22.2 U2.19
M5_Bh: M5.6 U2.25 | length 46.9
  Top Layer w0.25: v1(46.9,8.5) 48.7,8.5 49.235,7.965 49.235,7.77
  Bottom Layer w0.25: v1(46.9,8.5) 46.9,14.1 50.7,17.9 74,17.9 79.1,23 80.1,23 80.5,23.4 U2.25
M5_Bm: M5.4 U2.22 | length 41.1
  Top Layer w0.25: v1(49.2,9.2) 49.242,9.242 49.955,9.242
  Bottom Layer w0.25: v1(49.2,9.2) 49.2,9.7 49.8,10.3 56.4,10.3 62.6,16.5 74.7,16.5 79.7,21.5 80.7,21.5 82,22.8 U2.22
M5_Ch: M5.7 U2.26 | length 56.1
  Top Layer w0.25: v1(43.9,0.8) 43.9,1.596
  Bottom Layer w0.25: v1(43.9,0.8) 46,0.8 46.3,1.1 46.3,14.2 50.4,18.3 73.7,18.3 77.562,22.162 77.562,25.762 77.8,26 U2.26
M5_Cm: M5.3 U2.23 | length 38.7
  Top Layer w0.25: v1(49.7,15) 50.459,15
  Bottom Layer w0.25: v1(49.7,15) 49.7,14.415 50.359,13.756 58.956,13.756 62.2,17 74.5,17 79.5,22 80.5,22 81.5,23 U2.23
M6_Ah: M6.5 U2.96 | length 32.8
  Top Layer w0.25: v1(97.7,0.8) 97.7,1.595
  Bottom Layer w0.25: U2.96 95.7,28 97,26.7 97,18.4 95.5,16.9 95.5,1.1 95.8,0.8 v1(97.7,0.8)
M6_Am: M6.1 U2.92 | length 31.7
  Top Layer w0.25: M6.1@104.1,9.242 105.087,9.242 v1(105.1,9.242)
  Bottom Layer w0.25: U2.92@94.05,30.007 95.824,30.007 98.507,27.324 98.507,17.807 97.3,16.6 97.3,11.3 98.1,10.5 103.842,10.5 v1(105.1,9.242)
M6_Bh: M6.6 U2.97 | length 24.3
  Top Layer w0.25: v1(94.9,8.5) 96.7,8.5 97.235,7.965 97.235,7.77
  Bottom Layer w0.25: U2.97 95.493,27.5 96.5,26.493 96.5,18.6 94.9,17 v1(94.9,8.5)
M6_Bm: M6.4 U2.93 | length 24.4
  Top Layer w0.25: v1(97.2,9.2) 97.242,9.242 97.955,9.242
  Bottom Layer w0.25: U2.93 95.614,29.5 98,27.114 98,18 96.7,16.7 96.7,9.7 v1(97.2,9.2)
M6_Ch: M6.7 U2.98 | length 31.5
  Top Layer w0.25: v1(91.9,0.8) 91.9,1.596
  Bottom Layer w0.25: v1(91.9,0.8) 94,0.8 94.3,1.1 94.3,17.1 96,18.8 96,26.286 95.286,27 U2.98
M6_Cm: M6.3 U2.95 | length 19
  Top Layer w0.25: v1(96.1,15) 98.459,15
  Bottom Layer w0.25: U2.95 95.907,28.5 97.5,26.907 97.5,18.199 96.1,16.799 v1(96.1,15)
NetLD1_2: LD1.2 R5.1 | length 1.4
  Bottom Layer w0.25: LD1.2 R5.1
NetTP1_1: TP1.1 U2.91 | length 9
  Bottom Layer w0.25: U2.91 97.7,30.5 99.425,32.225 101.225,32.225 TP1.1
NetTP2_1: TP2.1 U2.90 | length 6.8
  Bottom Layer w0.25: U2.90 97.5,31 99.5,33 TP2.1
NetTP3_1: TP3.1 U2.89 | length 9.2
  Bottom Layer w0.25: U2.89 97.225,31.5 99.425,33.7 101.2,33.7 TP3.1
NetTP4_1: TP4.1 U2.88 | length 7
  Bottom Layer w0.25: U2.88 96.925,32 99.32,34.395 99.895,34.395 TP4.1
NetTP5_1: TP5.1 U2.87 | length 9.4
  Bottom Layer w0.25: U2.87 96.8,32.5 99.5,35.2 101.2,35.2 TP5.1
NetTP6_1: TP6.1 U2.86 | length 7.3
  Bottom Layer w0.25: U2.86 96.496,33 99.5,36.004 99.996,36.004 TP6.1 TP6.1@99.851,36
NetTP7_1: TP7.1 U2.85 | length 9.6
  Bottom Layer w0.25: U2.85 96.3,33.5 99.5,36.7 101.196,36.7 TP7.1
NetTP8_1: TP8.1 U2.84 | length 7.7
  Bottom Layer w0.25: U2.84 96.1,34 98.9,36.8 98.9,37.229 99.171,37.5 TP8.1
OSC_IN: C10.1 U2.12 X1.3 | length 6.4
  Bottom Layer w0.25: U2.12 87,22.4 88.4,21 88.4,20.25 88.45,20.3 C10.1 ; X1.3 88.375,20.225
OSC_OUT: C11.1 U2.13 X1.1 | length 7.6
  Bottom Layer w0.25: C11.1 85.6,20.3 ; X1.1 85.8,18.775 85.6,18.975 85.6,20.3 ; U2.13 86.5,22.4 85.6,21.5 85.6,20.3
SPI_MISO_1: B1.21 U2.31 | length 38.6
  Bottom Layer w0.25: B1.21 44.27,28.5 46.27,30.5 75.6,30.5 77.6,28.5 U2.31
SPI_MOSI_1: B1.19 U2.32 | length 41.3
  Bottom Layer w0.25: B1.19 41.73,28.475 44.255,31 75.8,31 77.8,29 U2.32
SPI_NSS_1: B1.24 U2.29 | length 40.1
  Bottom Layer w0.25: B1.24 47.604,21.714 47.85,21.96 47.85,28.6 48.75,29.5 75.3,29.5 77.3,27.5 U2.29
SPI_SCLK_1: B1.23 U2.30 | length 35.8
  Bottom Layer w0.25: B1.23 46.81,28.445 48.365,30 75.5,30 77.5,28 U2.30
STBY: U2.51 U3.8 | length 22.8
  Bottom Layer w0.25: U3.8 62.235,44.405 63.265,45.435 67.965,45.435 72.4,41 80.197,41 80.5,40.697 U2.51
SW_0: LSB.1 U2.1 | length 12.6
  Bottom Layer w0.25: LSB.1 89.7,13.8 89.9,14 90.4,14 92.5,16.1 U2.1
SW_1: JP1.1 U2.2 | length 13.4
  Bottom Layer w0.25: JP1.1 88.3,13.9 88.9,14.5 90.2,14.5 92,16.3 U2.2
SW_2: JP2.1 U2.3 | length 14.3
  Bottom Layer w0.25: JP2.1 86.95,13.35 86.95,14.05 87.9,15 90,15 91.5,16.5 U2.3
SW_3: JP3.1 U2.4 | length 15.1
  Bottom Layer w0.25: JP3.1 85.5,14 87.05,15.55 89.85,15.55 91,16.7 U2.4
SW_4: MSB.1 U2.5 | length 15.9
  Bottom Layer w0.25: MSB.1 84.1,14 86.05,15.95 89.55,15.95 90.5,16.9 U2.5
T_NRST: C7.2 J1.12 S1.2 U2.14 | length 47.4
  Top Layer w0.25: v2(81.3,44.8) v2(81.3,50) ; v1(84.8,22.5) v1(84.8,41.2)
  Bottom Layer w0.25: S1.2 74,49.8 79,44.8 v2(81.3,44.8) 81.8,44.8 84.8,41.8 v1(84.8,41.2) ; v2(81.3,50) 81.3,51.2 J1.12@81.31,51.21 ; C7.2 83.4,21.1 v1(84.8,22.5) 85.325,22.5 86,23.175 U2.14
T_SWCLK: J1.6 U2.76 | length 29.3
  Bottom Layer w0.25: J1.6 84.1,53.655 84.1,55.3 85.003,56.203 86.897,56.203 89.5,53.6 89.5,50.1 95.5,44.1 95.5,38.3 95.2,38 U2.76
T_SWDIO: J1.4 U2.72 | length 19.3
  Top Layer w0.25: v2(82.58,54) 83,53.58 83,49.8 v2(87.3,45.5)
  Bottom Layer w0.25: J1.4 v2(82.58,54) ; v2(87.3,45.5) 91,41.8 U2.72
T_VCP_RX: J1.14 U2.68 | length 16.1
  Bottom Layer w0.25: J1.14 78.77,50.83 89,40.6 U2.68
T_VCP_TX: J1.13 U2.69 | length 15.7
  Bottom Layer w0.25: J1.13 80.04,50.26 89.5,40.8 U2.69
pads on no net: B1.0 B1.3 B1.5 B1.7 B1.8 B1.10 B1.11 B1.12 B1.13 B1.15 B1.16 B1.18 B1.22 B1.26 B1.27 B1.28 B1.29 B1.31 B1.32 B1.33 B1.35 B1.36 B1.37 B1.38 B1.40 J1.1 J1.2 J1.8 J1.9 J1.10 J1.15 J1.16 J1.17 J1.18 J1.19 J1.20 J1.21 J2.6 J2.7 J3.6 J3.7 J7.2 J7.3 J7.4 M1.0 M1.2 M1.8 M1.14 M1.A1 M1.A2 M1.A3 M2.0 M2.2 M2.8 M2.14 M2.A1 M2.A2 M2.A3 M3.0 M3.2 M3.8 M3.14 M3.A1 M3.A2 M3.A3 M4.0 M4.2 M4.8 M4.14 M4.A1 M4.A2 M4.A3 M5.0 M5.2 M5.8 M5.14 M5.A1 M5.A2 M5.A3 M6.0 M6.2 M6.8 M6.14 M6.A1 M6.A2 M6.A3 S1.3 U1.4 U2.7 U2.8 U2.9 U2.10 U2.15 U2.16 U2.17 U2.18 U2.33 U2.34 U2.35 U2.36 U2.58 U2.59 U2.60 U2.61 U2.62 U2.63 U2.64 U2.65 U2.66 U2.67 U2.73 U2.83 X1.2 X1.4

## Polygon pours and split planes (outlines as drawn)
GND on Bottom Layer "Bottom Layer-GND" (solid, remove dead copper, pour order 0): 3,53.015 3.015,53.015 5,55 101,55 101,54.969 103,52.969 103,5 101,3 5,3 3,5

## Silkscreen, mask and mechanical layers (free items; w line width, h text height)
Top Overlay:
  drawing of 1838 lines, arcs and shapes, not listed
Bottom Overlay:
  drawing of 1610 lines, arcs and shapes, not listed
  text "120R" at 57.3,36.939 h1 r270
  text "Gregory Geraci / Hypnosia Controller V2.0 / Bachelor Thesis  / 07.07.2020 ARC" at 56.86,28.945 h1.5
Mechanical 1:
  the board outline again, w0.2

## Text inside footprints (layer, text, board x,y; h text height)
B1: Bottom Overlay "P1" at 16.95,27.2 h1